# Altium PCB PCB1.PcbDoc
Units mm, origin at the board's own origin, x right, y up, seen from the top; angles counter-clockwise.
Board outline 20 x 20 mm, 2 copper layers (Top Layer, Bottom Layer), stack 1.671 mm thick; 5 components, 4 nets, 10 pads, 1 vias.
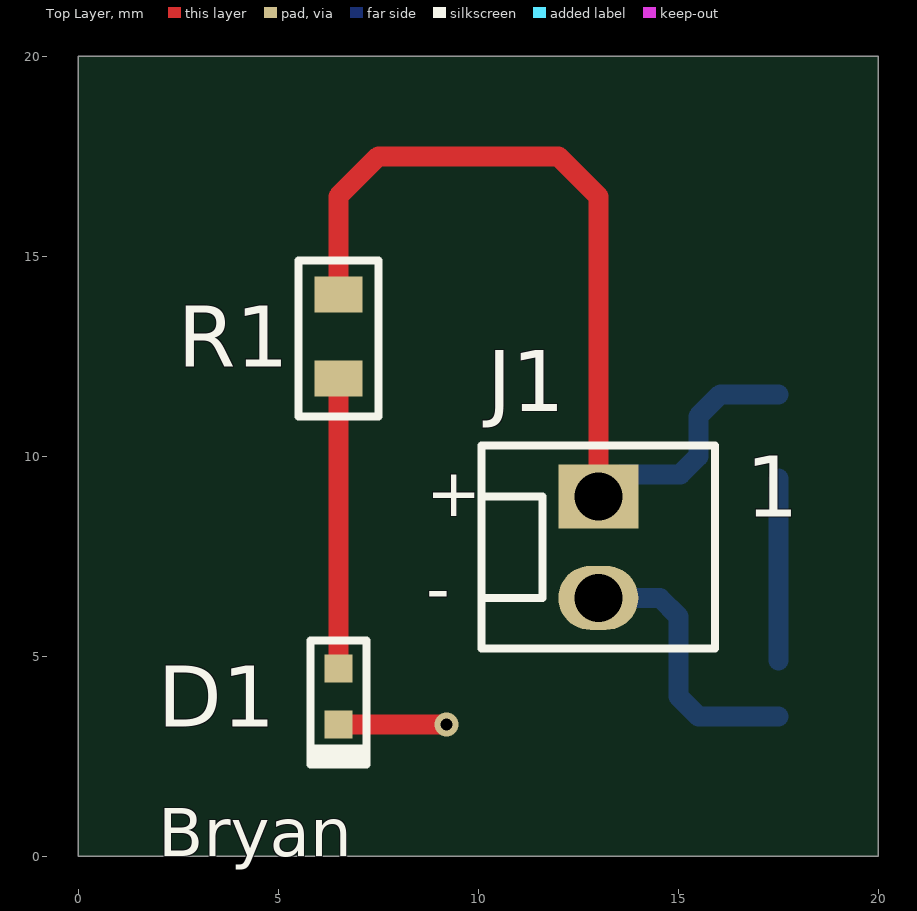
[diagram p0: Top Layer view]
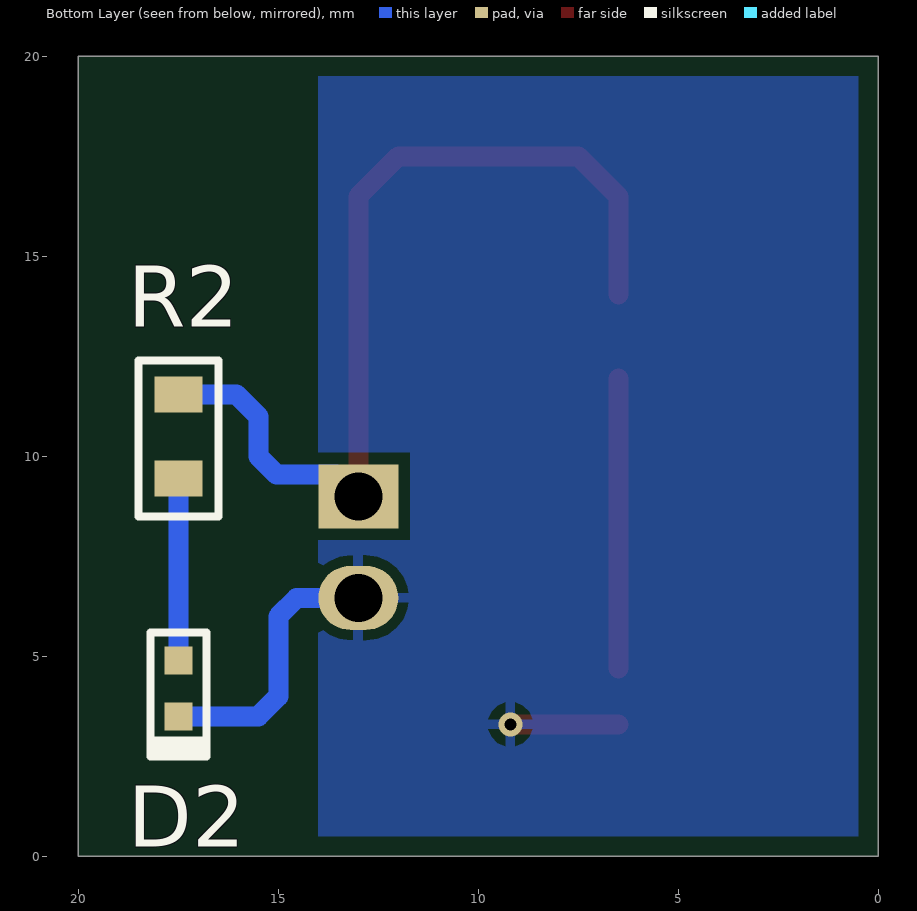
[diagram p1: Bottom Layer view, seen from below]
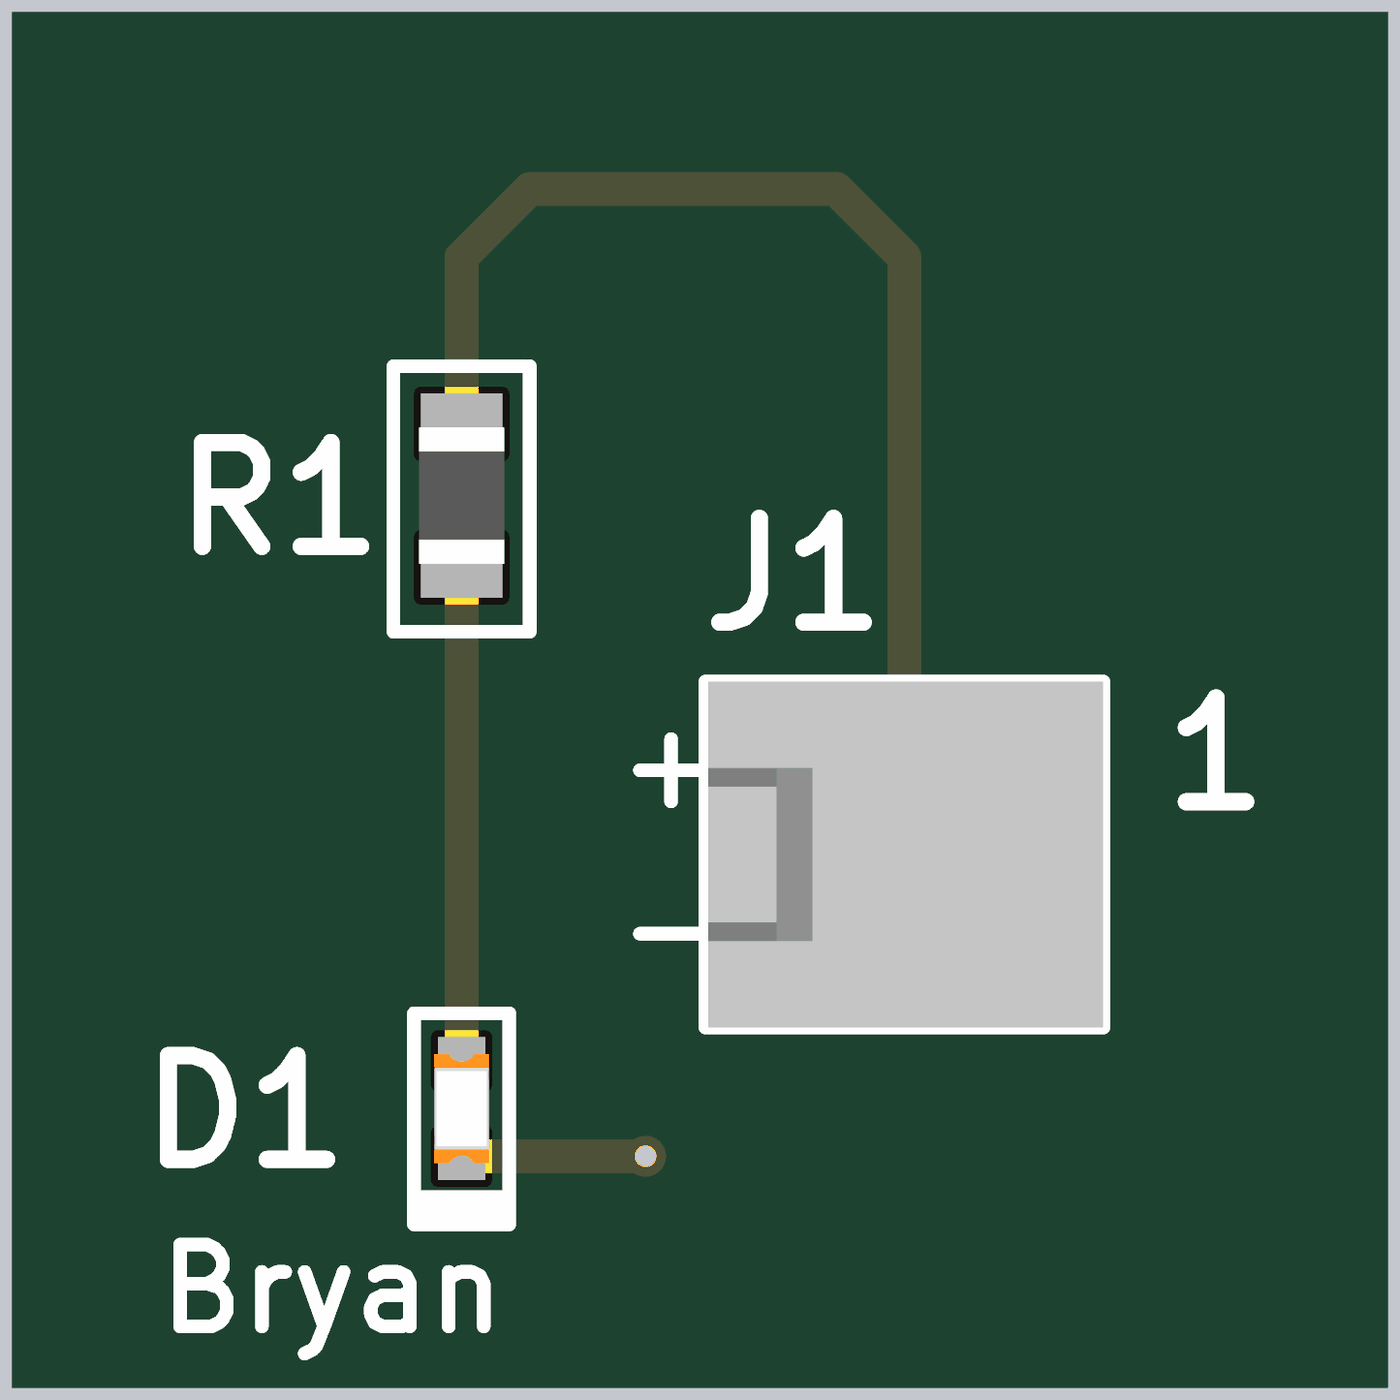
[diagram p2: 3D render of the assembled board from above, using the file's embedded part models]

## Layer stack, top to bottom
Top Solder: solder mask 0.0102, Solder Resist, Dk 3.5
Top Layer: signal copper 0.0356
Dielectric 1: dielectric 1.6, FR-4, Dk 4.8
Bottom Layer: signal copper 0.0356
Bottom Solder: solder mask 0.0102, Solder Resist, Dk 3.5

## Board outline
0,0 20,0 20,20 0,20

## Design rules (kind name [scope] priority, off if disabled: settings)
Clearance [All] p1: gap=0.3 ignorepadtopadclearanceinfootprint=FALSE
PolygonConnect [All] p1: connectstyle=Relief reliefconductorwidth=0.254 reliefentries=4 polygonreliefangle="90 Angle" airgapwidth=0.254
RoutingVias [All] p1: holewidth=0.3 width=0.6 viastyle="Through Hole" minholewidth=0.3 minwidth=0.6 maxholewidth=0.3 maxwidth=0.6
SilkToSolderMaskClearance [IsPad] p1: minsilkscreentomaskgap=0.1 clearancetoexposedcopper=TRUE
SolderMaskExpansion [All] p1: expansion=0.102 istentingtop=FALSE
Width [All] p1: maxlimit=1 minlimit=0.3 preferedwidth=0.5
29 further rules are at their usual default settings.

## Components (designator, comment, footprint, x,y, rotation, side; value= is the part's Value field where it differs from the comment)
D1 "GREEN" LED0603 6.5,4 r90 top
D2 "GREEN" LED0603 17.5,4.2 r90 bottom
J1 "1x2 Header" HDR1x2 13,9 r0 top
R1 "360R" R0805 6.5,13 r90 top
R2 "360R" R0805 17.5,10.5 r90 bottom

## Footprints (in the part's own frame and the unit in brackets; to place one, negate y for a bottom-side part, rotate by r counter-clockwise, add the part's x,y. Pads: shape width x height; smd on the part's side, far side on the other; paste and mask are expansions set on the pad)
HDR1x2 [mm]
  rect 2x1.6 hole 1.2: 1(0,0)
  oval 2x1.6 hole 1.2: 2(0,-2.54)
  silkscreen extent -2.92,-3.81 2.92,1.27, body extent -2.88,-3.81 2.92,1.27, height 11.71
LED0603 [mm]
  rect 0.7x0.7 smd: 1(-0.7,0) 2(0.7,0)
  silkscreen extent -1.7,-0.7 1.4,0.7, body extent -0.8,-0.4 0.8,0.4, height 0.59
R0805 [mm]
  rect 0.9x1.2 smd: 1(-1.05,0) 2(1.05,0)
  silkscreen extent -2,-1 1.9,1, body extent -1,-0.63 1,0.63, height 0.61

## Part data
D1 D2: library part LSM0603453V, "LED SM 0603 3V -/1000/-MCD GREEN", Case Code (Imperial)=0603, Case Code (Metric)=1608, Color=Green, Forward Voltage=2V, Lens Color=Colorless, Manufacturer="Visual Communications", Supplier Part Number 1=LSM0603453VCT-ND, Test Current=20mA, Case/Package=0603, Category=LEDs, ComponentLink1Description=http://www.farnell.com/datasheets/2699708.pdf?src-supplier=Farnell, ComponentLink1URL=http://www.farnell.com/datasheets/2699708.pdf?src-supplier=Farnell, ComponentLink2Description=http://www.farnell.com/datasheets/2699708.pdf?src-supplier=Newark, ComponentLink2URL=http://www.farnell.com/datasheets/2699708.pdf?src-supplier=Newark, ComponentLink3Description=https://vcclite.com/wp-content/uploads/wpallimport/files/files/LSM0603453V.pdf?src-supplier=Digi-Key, ComponentLink3URL=https://vcclite.com/wp-content/uploads/wpallimport/files/files/LSM0603453V.pdf?src-supplier=Digi-Key, Dominant Wavelength=572nm, Height=0.65mm, Length=1.6mm, Lens Size=0.8mm, Lens Style=Flat, Lens Transparency=Clear, Luminous Intensity=63mcd, Manufacturer Part Number=LSM0603453V, Mount="Surface Mount", Packaging="Cut Tape", Pricing 1="1=0.36000, 10=0.28400, 100=0.12770, 500=0.11536, 1000=0.09476, 2000=0.08240 (USD)", RoHS=Yes, RoHS Compliant=Yes, Stock 1=95508, Supplier 1=Digi-Key, Viewing Angle=120°, Width=0.8mm
J1: library part 22-27-2021, "CONN HEADER VERT 2POS 2.54MM", Color=White, Contact Resistance=20mR, Current Rating=4A, Flammability Rating="UL94 V-0", Housing Color=Natural, Insulation Resistance=50GR, Manufacturer=Molex, Max Operating Temperature=75°C, Min Operating Temperature=0°C, Package Quantity=24000, Supplier Part Number 1=WM4111-ND, Voltage Rating=500V, Voltage Rating (AC)=250V, Approvals=UL,CSA, Category="Headers and Wire Housings", Contact Gender=Male, Contact Material=Tin, Contact Plating=Tin, Contact Type=-, Depth=5.8mm, Gender=Male, Height=11.7mm, Housing Material=Nylon, Lead Free="Lead Free", Lead Pitch=2.54mm, Length=10.16mm, Manufacturer Part Number=22-27-2021, Material=Nylon, Max Current Rating=4A, Mount="Through Hole", Number of Circuits=2, Number of Contacts=2, Number of Positions=2, Number of Rows=1, Orientation=Straight, Packaging=Bulk, Pitch=2.54mm, Pricing 1="1=0.31000, 10=0.25500, 100=0.18710, 1000=0.14884, 5000=0.12758, 10000=0.11907 (USD)", Radiation Hardening=No, REACH SVHC=Unknown, RoHS=Yes, RoHS Compliant=Yes, Series=6410, Stock 1=35147, Supplier 1=Digi-Key, Termination="Through Hole", Voltage Rating (DC)=250V, Weight=0.00769oz, Working Voltage=250V
R1 R2: library part AC0805FR-07360RL, "RES 360 OHM 1% 1/8W 0805", Case Code (Imperial)=0805, Case Code (Metric)=2012, Manufacturer=Yageo, Manufacturer Part Number=RC0805FR-07360RL, Max Operating Temperature=155°C, Max Power Dissipation=125mW, Min Operating Temperature=-55°C, Supplier Part Number 1=311-360CRCT-ND, Temperature Coefficient=100ppm/°C, Tolerance=1%, Voltage Rating=150V, Case/Package=0805, Category="Chip SMD Resistors", ComponentLink1Description=https://datasheet.ciiva.com/11808/0900766b8106beab-11808261.pdf?src-supplier=RSComponents, ComponentLink1URL=https://datasheet.ciiva.com/11808/0900766b8106beab-11808261.pdf?src-supplier=RSComponents, ComponentLink2Description=https://datasheet.ciiva.com/12667/rc0805-12667401.pdf?src-supplier=Mouser, ComponentLink2URL=https://datasheet.ciiva.com/12667/rc0805-12667401.pdf?src-supplier=Mouser, ComponentLink3Description=https://datasheet.ciiva.com/17423/rc0805-17423149.pdf?src-supplier=Future+Electronics, ComponentLink3URL=https://datasheet.ciiva.com/17423/rc0805-17423149.pdf?src-supplier=Future+Electronics, Depth=1.25mm, Features="Moisture Resistant", Height=0.5mm, Lead Free="Lead Free", Length=2mm, Mount="Surface Mount", Number of Terminations=2, Packaging="Tape and Reel", Power Rating=125mW, Pricing 1="1=0.10000, 10=0.03800, 100=0.01560, 1000=0.00699, 2500=0.00607 (USD)", Resistance=360R, RoHS=Yes, RoHS Compliant=Yes, Series=RC, Size Code=0805, Stock 1=4900, Supplier 1=Digi-Key, Technology="THICK FILM", Termination=SMD/SMT, Voltage Rating (DC)=150V

## Via types
v1: diameter 0.6, hole 0.3, Top Layer to Bottom Layer, tented both sides, 1 vias

## Nets (pads, with @x,y where several pads share a name; then routed paths per layer and width w, separated by ;. In a path a pad name is that pad's centre, name@x,y a point inside that pad or via, vN(x,y) a via of type N, cw(c..) or ccw(c..) an arc to the next point about the centre after c; other vN are vias at no path point)
+3V3: J1.1 R1.2 R2.2 | length 23.4
  Top Layer w0.5: R1.2 6.5,16.5 7.5,17.5 12,17.5 13,16.5 J1.1
  Bottom Layer w0.5: J1.1 13.55,9.55 15.05,9.55 15.5,10 15.5,11 16.05,11.55 R2.2
"DIODE 1": D1.2 R1.1 | length 7.2
  Top Layer w0.5: D1.2 R1.1
"DIODE 2": D2.2 R2.1 | length 4.5
  Bottom Layer w0.5: D2.2 R2.1
GND: D1.1 D2.1 J1.2 | length 9.6
  Top Layer w0.5: D1.1 v1(9.2,3.3)
  Bottom Layer w0.5: J1.2 14.54,6.46 15,6 15,4 15.5,3.5 D2.1

## Polygon pours and split planes (outlines as drawn)
GND on Bottom Layer "GND_L02_P000" (solid, pour order 0): 0.5,0.5 14,0.5 14,19.5 0.5,19.5

## Silkscreen, mask and mechanical layers (free items; w line width, h text height)
Top Overlay:
  text "+" at 8.7,8.5 h1.2
  text "-" at 8.7,6.1 h1.2
  text "Bryan" at 2,0 h1.2
Board:
  the board outline again, w0.2

## Text inside footprints (layer, text, board x,y; h text height)
J1: Top Overlay "1" at 16.683,8.492 h1.52